# Altium PCB Flight_Computer_1.PcbDoc (part 3 of 4)
Units mm, origin at the board's own origin, x right, y up, seen from the top; angles counter-clockwise.
Board outline 101.6 x 76.2 mm, 4 copper layers (Top Layer, GND, 3.3V, Bottom Layer), stack 1.574 mm thick; 111 components, 86 nets, 493 pads, 1677 vias.
Unrouted connection lines stored in the file: 302.
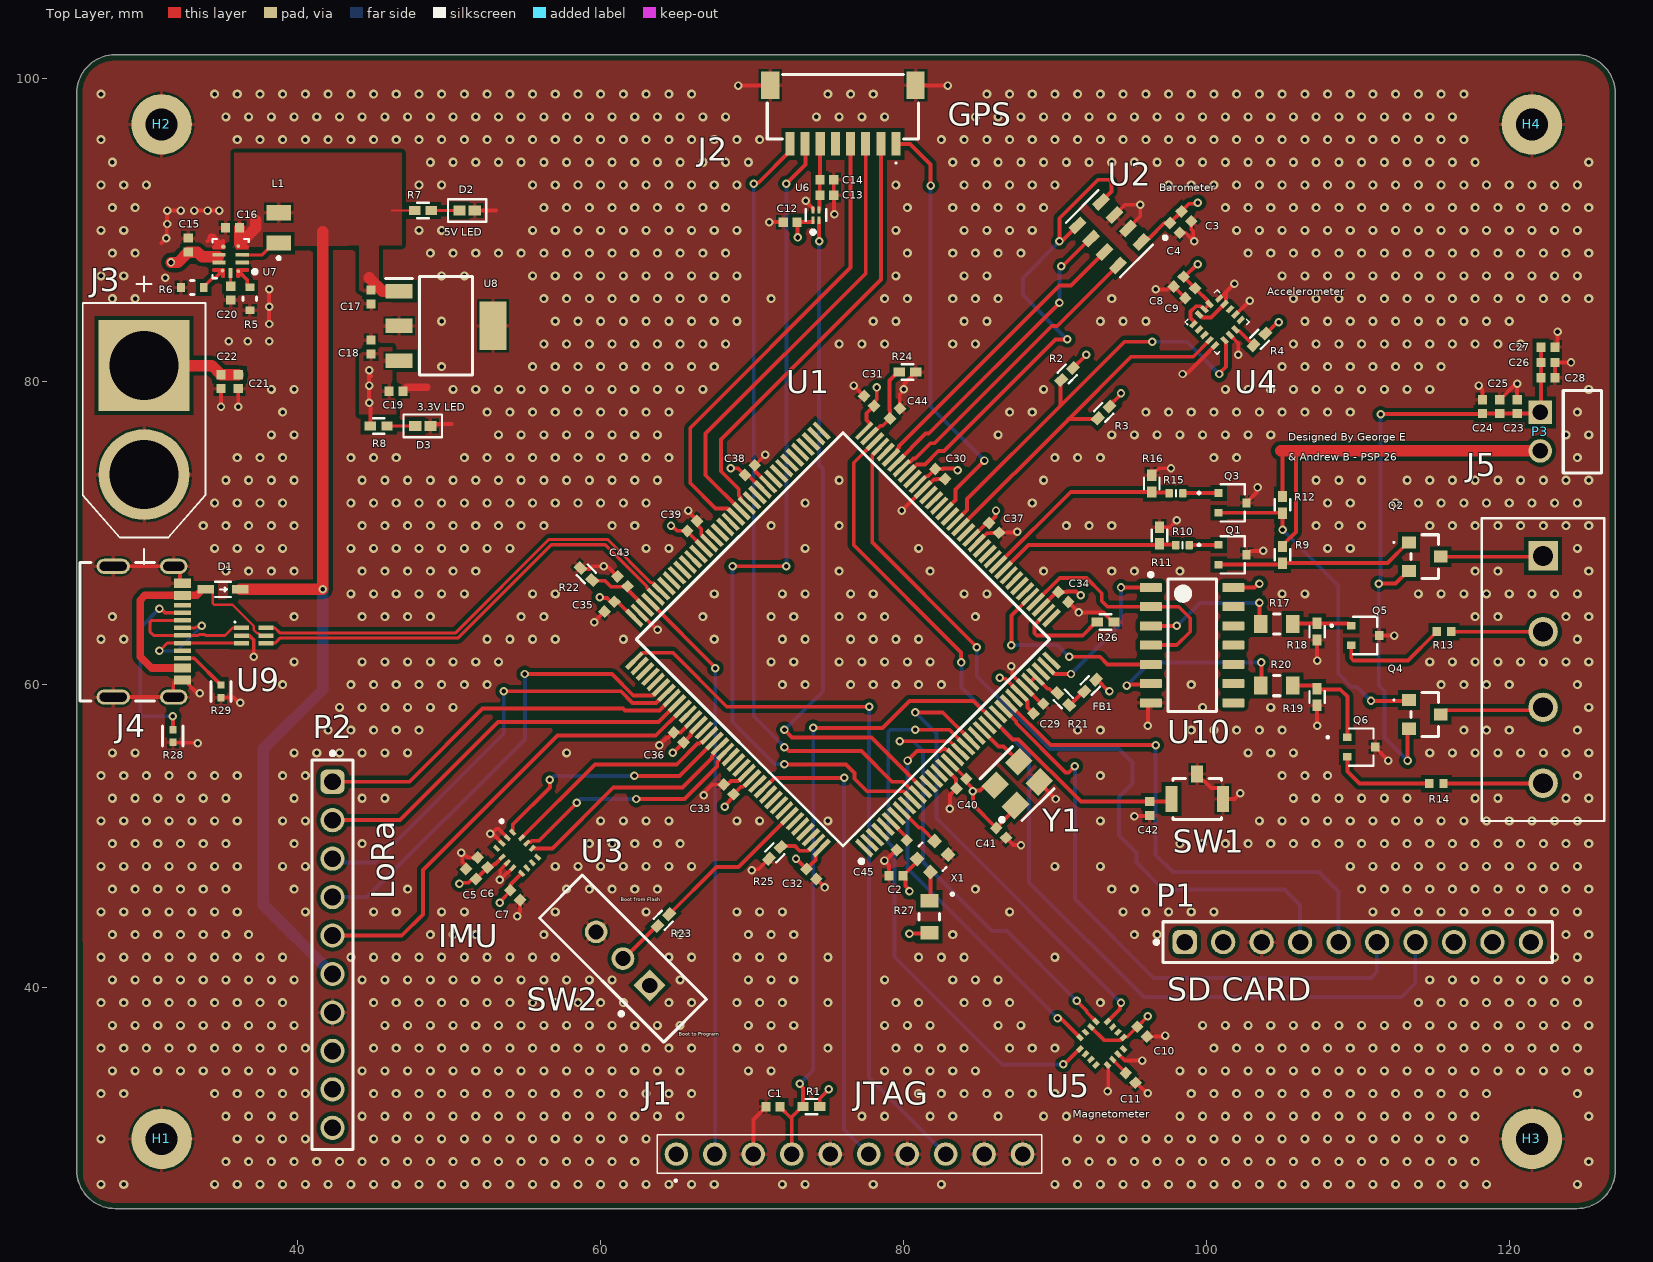
[diagram p0: Top Layer view]

## Part data (continued)
R8: library part R_1k_0402, "RES 1K OHM 1% 1/16W 0402", Case Code (Imperial)=0402, LCSC Part #=C106235, Manufacturer="Yageo Group", Manufacturer Part Number=RC0402FR-071KL, Max Operating Temperature=155°C, Min Operating Temperature=-55°C, Power Dissipation=62.5mW, Power Rating=63mW, Supplier Part Number=311-1.00KLRTR-ND, Temperature Coefficient=100ppm/°C, Tolerance=1%, Voltage Rating=50V, Case Code (Metric)=0402, Case/Package=0402, Category="Chip SMD Resistors", China RoHS=Non-Compliant, ComponentLink1Description=https://datasheet.octopart.com:443/RC0402FR-071KL-Yageo-datasheet-175887523.pdf?src-supplier=IHS, ComponentLink1URL=https://datasheet.octopart.com:443/RC0402FR-071KL-Yageo-datasheet-175887523.pdf?src-supplier=IHS, ComponentLink2Description=https://datasheet.octopart.com:443/RC0402FR-071KL-Yageo-datasheet-164759695.pdf?src-supplier=Upverter, ComponentLink2URL=https://datasheet.octopart.com:443/RC0402FR-071KL-Yageo-datasheet-164759695.pdf?src-supplier=Upverter, ComponentLink3Description=https://datasheet.octopart.com:443/RC0402FR-071KL-Yageo-datasheet-103092701.pdf?src-supplier=Upverter, ComponentLink3URL=https://datasheet.octopart.com:443/RC0402FR-071KL-Yageo-datasheet-103092701.pdf?src-supplier=Upverter, ComponentLink4Description=https://sigma.octopart.com:443/138820526/technical_drawing/Yageo-RC0402FR-071KL.pdf?src-supplier=Upverter, ComponentLink4URL=https://sigma.octopart.com:443/138820526/technical_drawing/Yageo-RC0402FR-071KL.pdf?src-supplier=Upverter, ComponentLink5Description=https://datasheet.octopart.com:443/RC0402FR-071KL-Yageo-datasheet-98239111.pdf?src-supplier=Upverter, ComponentLink5URL=https://datasheet.octopart.com:443/RC0402FR-071KL-Yageo-datasheet-98239111.pdf?src-supplier=Upverter, ComponentLink6Description=https://datasheet.octopart.com:443/RC0402FR-071KL-Yageo-datasheet-10408619.pdf?src-supplier=Newark, ComponentLink6URL=https://datasheet.octopart.com:443/RC0402FR-071KL-Yageo-datasheet-10408619.pdf?src-supplier=Newark, ComponentLink7Description=https://datasheet.octopart.com:443/RC0402FR-071KL-Yageo-datasheet-8324527.pdf?src-supplier=Newark, ComponentLink7URL=https://datasheet.octopart.com:443/RC0402FR-071KL-Yageo-datasheet-8324527.pdf?src-supplier=Newark, ComponentLink8Description=https://datasheet.octopart.com:443/RC0402FR-071KL-Yageo-datasheet-62067350.pdf?src-supplier=Farnell, ComponentLink8URL=https://datasheet.octopart.com:443/RC0402FR-071KL-Yageo-datasheet-62067350.pdf?src-supplier=Farnell, ComponentLink9Description=https://datasheet.octopart.com:443/RC0402FR-071KL-Yageo-datasheet-12531192.pdf?src-supplier=Future+Electronics, ComponentLink9URL=https://datasheet.octopart.com:443/RC0402FR-071KL-Yageo-datasheet-12531192.pdf?src-supplier=Future+Electronics, ComponentLink10Description=https://datasheet.octopart.com:443/RC0402FR-071KL-Yageo-datasheet-137700087.pdf?src-supplier=Future+Electronics, ComponentLink10URL=https://datasheet.octopart.com:443/RC0402FR-071KL-Yageo-datasheet-137700087.pdf?src-supplier=Future+Electronics, ComponentLink11Description=https://datasheet.octopart.com:443/RC0402FR-071KL-Yageo-datasheet-8324255.pdf?src-supplier=Future+Electronics, ComponentLink11URL=https://datasheet.octopart.com:443/RC0402FR-071KL-Yageo-datasheet-8324255.pdf?src-supplier=Future+Electronics, ComponentLink12Description=https://datasheet.octopart.com:443/RC0402FR-071KL-Yageo-datasheet-8329306.pdf?src-supplier=element14, ComponentLink12URL=https://datasheet.octopart.com:443/RC0402FR-071KL-Yageo-datasheet-8329306.pdf?src-supplier=element14, ComponentLink13Description=https://datasheet.octopart.com:443/RC0402FR-071KL-Yageo-datasheet-505231.pdf?src-supplier=element14, ComponentLink13URL=https://datasheet.octopart.com:443/RC0402FR-071KL-Yageo-datasheet-505231.pdf?src-supplier=element14, ComponentLink14Description=https://datasheet.octopart.com:443/RC0402FR-071KL-Yageo-datasheet-175423674.pdf?src-supplier=SOS+electronic, ComponentLink14URL=https://datasheet.octopart.com:443/RC0402FR-071KL-Yageo-datasheet-175423674.pdf?src-supplier=SOS+electronic, ComponentLink15Description=https://datasheet.octopart.com:443/RC0402FR-071KL-Yageo-datasheet-148775077.pdf?src-supplier=TME, ComponentLink15URL=https://datasheet.octopart.com:443/RC0402FR-071KL-Yageo-datasheet-148775077.pdf?src-supplier=TME, ComponentLink16Description=https://datasheet.octopart.com:443/RC0402FR-071KL-Yageo-datasheet-79472498.pdf?src-supplier=Megastar, ComponentLink16URL=https://datasheet.octopart.com:443/RC0402FR-071KL-Yageo-datasheet-79472498.pdf?src-supplier=Megastar, ComponentLink17Description=https://datasheet.octopart.com/RC0402FR-071KL-Yageo-datasheet-73766026.pdf, ComponentLink17URL=https://datasheet.octopart.com/RC0402FR-071KL-Yageo-datasheet-73766026.pdf, ComponentLink18Description=http://sigma.octopart.com:80/rohs_statement/Yageo-company-2.pdf?src-supplier=Compliance+Statements, ComponentLink18URL=http://sigma.octopart.com:80/rohs_statement/Yageo-company-2.pdf?src-supplier=Compliance+Statements, ComponentLink19Description=http://sigma.octopart.com:80/conflict_mineral_statement/Yageo-company-3.pdf?src-supplier=Compliance+Statements, ComponentLink19URL=http://sigma.octopart.com:80/conflict_mineral_statement/Yageo-company-3.pdf?src-supplier=Compliance+Statements, Composition="Thick Film", Depth=500µm, Height=350µm, Lead Free="Lead Free", Length=1mm, Lifecycle Status=Production, Military Standard=Not, Mounting Technology="Surface Mount", Number of Terminals=2, Packaging="Tape & Reel", Pins=2, Pricing="10000=0.00204, 20000=0.002, 30000=0.00196, 50000=0.00182, 70000=0.00181 (USD)", REACH SVHC=Yes, RoHS=Compliant, Schedule B="8533210045, 8533210045|8533210045|8533210045|8533210045|8533210045|8533210045|8533210045|8533210045|8533210045|8533210045|8533210045|8533210045|8533210045|8533210045|8533210045|8533210045|8533210045|8533210045|8533210045|8533210045|8533210045|8533210045|8533210045|85", Stock=4926888, Supplier=DigiKey, Termination=SMD/SMT, Voltage Rating (AC)=50V, Voltage Rating (DC)=50V, Width=500µm, Working Voltage=50V
R10 R15: library part CMP-009-00164-4, "Chip Resistor, 22 Ohms, +/-5 %, 63 mW, -55 to 155 degC, 0402", Case/Package=0402, Max Operating Temperature=155°C, Min Operating Temperature=-55°C, Power=63mW, Tolerance=5%, Pins=2
R13 R14 R21 R22 R24 R25 R26: library part R_0R_0402, "GENERAL PURPOSE CHIP RESISTOR Metal Glaze/thick Film, 0.0625W, 0ohm, Surface Mount, 0402", Case Code (Imperial)=0402, LCSC Part #=C60485, Manufacturer="Yageo Group", Manufacturer Part Number=RC0402JR-070RL, Max Operating Temperature=155°C, Max Power Dissipation=63mW, Min Operating Temperature=-55°C, Power Dissipation=62.5mW, Supplier Part Number=311-0.0JRDKR-ND, Temperature Coefficient=200ppm/°C, Tolerance=5%, Voltage Rating=50V, Case/Package=0402, Category="Chip SMD Resistors", China RoHS=Non-Compliant, ComponentLink1Description=https://datasheet.octopart.com:443/RC0402JR-070RL-Yageo-datasheet-182189538.pdf?src-supplier=IHS, ComponentLink1URL=https://datasheet.octopart.com:443/RC0402JR-070RL-Yageo-datasheet-182189538.pdf?src-supplier=IHS, ComponentLink2Description=https://datasheet.octopart.com:443/RC0402JR-070RL-Yageo-datasheet-10408619.pdf?src-supplier=Newark, ComponentLink2URL=https://datasheet.octopart.com:443/RC0402JR-070RL-Yageo-datasheet-10408619.pdf?src-supplier=Newark, ComponentLink3Description=https://datasheet.octopart.com:443/RC0402JR-070RL-Yageo-datasheet-12531192.pdf?src-supplier=Seeed+Studio, ComponentLink3URL=https://datasheet.octopart.com:443/RC0402JR-070RL-Yageo-datasheet-12531192.pdf?src-supplier=Seeed+Studio, ComponentLink4Description=https://datasheet.octopart.com:443/RC0402JR-070RL-Yageo-datasheet-8324527.pdf?src-supplier=TME, ComponentLink4URL=https://datasheet.octopart.com:443/RC0402JR-070RL-Yageo-datasheet-8324527.pdf?src-supplier=TME, ComponentLink5Description=https://datasheet.octopart.com:443/RC0402JR-070RL-Yageo-datasheet-62067350.pdf?src-supplier=Farnell, ComponentLink5URL=https://datasheet.octopart.com:443/RC0402JR-070RL-Yageo-datasheet-62067350.pdf?src-supplier=Farnell, ComponentLink6Description=https://datasheet.octopart.com:443/RC0402JR-070RL-Yageo-datasheet-8329306.pdf?src-supplier=element14, ComponentLink6URL=https://datasheet.octopart.com:443/RC0402JR-070RL-Yageo-datasheet-8329306.pdf?src-supplier=element14, ComponentLink7Description=https://datasheet.octopart.com:443/RC0402JR-070RL-Yageo-datasheet-505231.pdf?src-supplier=element14, ComponentLink7URL=https://datasheet.octopart.com:443/RC0402JR-070RL-Yageo-datasheet-505231.pdf?src-supplier=element14, ComponentLink8Description=https://datasheet.octopart.com:443/RC0402JR-070RL-Yageo-datasheet-175423674.pdf?src-supplier=SOS+electronic, ComponentLink8URL=https://datasheet.octopart.com:443/RC0402JR-070RL-Yageo-datasheet-175423674.pdf?src-supplier=SOS+electronic, ComponentLink9Description=https://datasheet.octopart.com:443/RC0402JR-070RL-Yageo-datasheet-164759695.pdf?src-supplier=Future+Electronics, ComponentLink9URL=https://datasheet.octopart.com:443/RC0402JR-070RL-Yageo-datasheet-164759695.pdf?src-supplier=Future+Electronics, ComponentLink10Description=https://datasheet.octopart.com:443/RC0402JR-070RL-Yageo-datasheet-137700087.pdf?src-supplier=Future+Electronics, ComponentLink10URL=https://datasheet.octopart.com:443/RC0402JR-070RL-Yageo-datasheet-137700087.pdf?src-supplier=Future+Electronics, ComponentLink11Description=https://datasheet.octopart.com/RC0402JR-070RL-Yageo-datasheet-73766026.pdf, ComponentLink11URL=https://datasheet.octopart.com/RC0402JR-070RL-Yageo-datasheet-73766026.pdf, ComponentLink12Description=http://sigma.octopart.com:80/rohs_statement/Yageo-company-2.pdf?src-supplier=Compliance+Statements, ComponentLink12URL=http://sigma.octopart.com:80/rohs_statement/Yageo-company-2.pdf?src-supplier=Compliance+Statements, ComponentLink13Description=http://sigma.octopart.com:80/conflict_mineral_statement/Yageo-company-3.pdf?src-supplier=Compliance+Statements, ComponentLink13URL=http://sigma.octopart.com:80/conflict_mineral_statement/Yageo-company-3.pdf?src-supplier=Compliance+Statements, Composition="Thick Film", Contact Plating=Tin, Depth=500µm, Features="Moisture Resistant", Height=350µm, Lead Free="Lead Free", Length=1mm, Lifecycle Status=Production, Military Standard=Not, Mounting Technology="Surface Mount", Number of Terminals=2, Number of Terminations=2, Packaging="Tape & Reel", Pins=2, Power Rating=63mW, Pricing="1=0.1, 10=0.010, 25=0.0064, 50=0.0054, 100=0.0047, 250=0.00392, 500=0.00346, 1000=0.00304, 5000=0.0023 (USD)", Radiation Hardening=No, REACH SVHC=Yes, RoHS=Compliant, Schedule B="8533290000, 8533290000|8533290000, 8533290000|8533290000|8533290000, 8533290000|8533290000|8533290000|8533290000", Stock=23041339, Supplier=DigiKey, Termination=SMD/SMT, Voltage Rating (DC)=50V, Width=500µm
R17 R20 R27: library part CMP-03412-037823-1, "RES SMD 0 OHM JUMPER 1/8W 0805", Case Code (Imperial)=0805, Case Code (Metric)=2012, Max Operating Temperature=155°C, Max Power Dissipation=125mW, Min Operating Temperature=-55°C, Resistance=0R, Resistor Type="Thick Film", Temperature Coefficient=200ppm/°C, Tolerance=5%, Voltage Rating=150V, Case/Package=0805, Features="Moisture Resistant", Height=0.024inch, Lead Free="Lead Free", Length=0.079inch, Number of Terminations=2, Packaging="Tape and Reel", Power Rating=125mW, Series=AC, Termination=SMD/SMT, Width=1.25mm
R28 R29: library part CMP-04015-008529-1, "5.1kΩ ±1% 0.063W, 1/16W Chip Resistor 0402 (1005 Metric) Moisture Resistant Thin Film"
SW1: library part CMP-08834-000028-1, "SWITCH TACTILE SPST-NO 0.05A 12V", Case/Package=SMD/SMT, Contact Resistance=100mR, Current Rating=50mA, Max Operating Temperature=70°C, Max Voltage Rating (DC)=12V, Min Operating Temperature=-25°C, Operating Force=1.5N, Package Quantity=1000, Ratings="Dust Proof", Actuator Length=0.4mm, Actuator Type=Standard, Connector Type=SMD/SMT, Electrical Life=200000Cycles, Illumination Type=Non-Illuminated, Mechanical Life=200000Cycles, Mount="Surface Mount", Orientation=Straight, Packaging="Tape and Reel", REACH SVHC="No SVHC", RoHS Compliant=Yes, Series=B3U, Switch Function=Off-Mom, Switch Travel=0.15mm, Termination=SMD/SMT, Throw Configuration=SPST, Voltage Rating (DC)=12V, Weight=0.022g
SW2: library part CMP-011-00006-2, "Slide Switch, SPDT, 500 V, -20 to 70 degC, 3-Pin THD, RoHS, Bulk", Contact Current Rating=200mA, Manufacturer=E-Switch, Max Operating Temperature=70°C, Min Operating Temperature=-20°C, Operating Force=250gf, Package Description="3-Pin Through Hole Device, Body 11.6 x 4 mm, Pitch 2.5 mm", Package Quantity=1000, Voltage Rating (AC)=30V, Case/Package=EG1218, Contact Finish=Silver, Contact Material=Copper, Contact Plating=Silver, Current Rating=200mA, Datasheet URL=https://www.e-switch.com/system/asset/product_line/data_sheet/119/EG.pdf, Datasheet Version=Oct-15, Manufacturer URL=http://www.e-switch.ch/en/, Mounting Technology=TH, Package Reference=EG1218, Packaging=Bulk, Pins=3, RoHS Compliant=True, Throw Configuration=SPDT, Voltage Rating (DC)=30V
U1: "Integrated Circuit", Manufacturer_Name=STMicroelectronics, Mouser Part Number=511-STM32F765ZIT7, Arrow Part Number=STM32F765ZIT7, Arrow Price/Stock=https://www.arrow.com/en/products/stm32f765zit7/stmicroelectronics?utm_currency=USD&region=nac, Datasheet Link=https://www.st.com/resource/en/datasheet/stm32f765bi.pdf, Height=1.6mm, Manufacturer_Part_Number=STM32F765ZIT7, Mouser Price/Stock=https://www.mouser.co.uk/ProductDetail/STMicroelectronics/STM32F765ZIT7?qs=lYGu3FyN48df6bb2YhdYOw%3D%3D
U2: "SENSOR 17.4PSIA 24BIT 8SMD", LCSC Part #=C97627, Manufacturer="TE Connectivity", Max Operating Temperature=85°C, Max Supply Voltage=3.6V, Min Operating Temperature=-40°C, Min Supply Voltage=1.8V, Operating Current-Max=1.4mA, Package Shape/Style=Rectangular, Supplier Part Number=223-1198-1-ND, Accuracy-Max (%)=4%, Body Breadth=3mm, Body Height=0.95mm, Body Length or Diameter=5mm, Category="Pressure Sensors", ComponentLink1Description=https://www.te.com:443/usa-en/product-MS560702BA03-50.datasheet.pdf?src-supplier=IHS+Markit, ComponentLink1URL=https://www.te.com:443/usa-en/product-MS560702BA03-50.datasheet.pdf?src-supplier=IHS+Markit, ComponentLink2Description=http://www.farnell.com/datasheets/1756127.pdf?src-supplier=Farnell, ComponentLink2URL=http://www.farnell.com/datasheets/1756127.pdf?src-supplier=Farnell, ComponentLink3Description=https://datasheet.octopart.com/MS560702BA03-50-TE-Connectivity-datasheet-21074431.pdf?src-supplier=Element14, ComponentLink3URL=https://datasheet.octopart.com/MS560702BA03-50-TE-Connectivity-datasheet-21074431.pdf?src-supplier=Element14, ComponentLink4Description=https://www.te.com/commerce/DocumentDelivery/DDEController?Action=srchrtrv&DocNm=MS5607-02BA03&DocType=Data+Sheet&DocLang=English&src-supplier=Digikey, ComponentLink4URL=https://www.te.com/commerce/DocumentDelivery/DDEController?Action=srchrtrv&DocNm=MS5607-02BA03&DocType=Data+Sheet&DocLang=English&src-supplier=Digikey, ComponentLink5Description=https://datasheet.octopart.com/MS560702BA03-50-TE-Connectivity-datasheet-176112741.pdf?src-supplier=Future+Electronics, ComponentLink5URL=https://datasheet.octopart.com/MS560702BA03-50-TE-Connectivity-datasheet-176112741.pdf?src-supplier=Future+Electronics, ComponentLink6Description=https://datasheet.octopart.com/MS560702BA03-50-TE-Connectivity-datasheet-65793091.pdf?src-supplier=Sager+Electronics, ComponentLink6URL=https://datasheet.octopart.com/MS560702BA03-50-TE-Connectivity-datasheet-65793091.pdf?src-supplier=Sager+Electronics, Manufacturer Part Number=MS560702BA03-50, Mounting Technology="Surface Mount", Number of Bits=24, Output Interface Type=I2C, Output Range=0-3V, Output Type="DIGITAL VOLTAGE", Pressure Range-Max=15.95PSI, Pressure Range-Min=4.351PSI, Pressure Type=Barometric, Pricing="1=9.05, 5=8.384, 10=7.721, 25=7.436, 50=6.9272, 100=5.8731, 500=5.46908, 1000=5.89422, 3600=5.375 (USD)", Reach SVHC Compliant=No, Response Time=8220us, RoHS=Yes, RoHS Compliant=Yes, Sensor Type="PRESSURE SENSOR,PEIZORESISTIVE", Stock=43971, Supplier=Digikey, Termination=Solder
U3: "Accelerometer and Gyroscope 6-Axis 3D Digital-I2C/Digital-SPI-OUT 14-Pin LGA T/R", LCSC Part #=C459826, Manufacturer=STMicroelectronics, Max Operating Temperature=105°C, Max Supply Voltage=3.6V, Min Operating Temperature=-40°C, Min Supply Voltage=2V, Mouser Part Number=511-ASM330LHHTR, Operating Supply Voltage=3V, Supplier Part Number=497-19078-1-ND, Arrow Part Number=ASM330LHHTR, Arrow Price/Stock=https://www.arrow.com/en/products/asm330lhhtr/stmicroelectronics?utm_currency=USD&region=europe, Category=Accelerometers, China RoHS=Non-Compliant, ComponentLink1Description=https://datasheet.octopart.com:443/ASM330LHHTR-STMicroelectronics-datasheet-181242432.pdf?src-supplier=IHS, ComponentLink1URL=https://datasheet.octopart.com:443/ASM330LHHTR-STMicroelectronics-datasheet-181242432.pdf?src-supplier=IHS, ComponentLink2Description=https://datasheet.octopart.com:443/ASM330LHHTR-STMicroelectronics-datasheet-129375621.pdf?src-supplier=ODG+(Origin+Data+Global), ComponentLink2URL=https://datasheet.octopart.com:443/ASM330LHHTR-STMicroelectronics-datasheet-129375621.pdf?src-supplier=ODG+(Origin+Data+Global), Datasheet Link=https://www.st.com/resource/en/datasheet/asm330lhh.pdf, Height=0.86mm, Height - Seated (Max)=860µm, Length=3mm, Lifecycle Status=Production, Manufacturer Part Number=ASM330LHHTR, Manufacturer_Name=STMicroelectronics, Manufacturer_Part_Number=ASM330LHHTR, Mouser Price/Stock=https://www.mouser.co.uk/ProductDetail/STMicroelectronics/ASM330LHHTR?qs=lc2O%252BfHJPVYgP8P9MzExKQ%3D%3D, Number of Circuits=1, Number of Terminals=14, Output Type=Digital, Pricing="1=7.25, 5=6.54, 10=6.275, 25=5.9592, 50=5.743, 100=5.545, 500=5.34888 (USD)", REACH SVHC=Yes, RoHS=Compliant, Stock=5000, Supplier=DigiKey, Terminal Pitch=500µm, Width=2.5mm
U4: "ACCELEROMETER 100G I2C/SPI 16LGA", Case/Package=LGA, LCSC Part #=C2655068, Manufacturer=STMicroelectronics, Max Operating Temperature=85°C, Max Supply Voltage=3.6V, Min Operating Temperature=-40°C, Min Supply Voltage=2.16V, Mouser Part Number=511-H3LIS100DLTR, Operating Supply Voltage=2.5V, Supplier Part Number=497-15697-1-ND, Arrow Part Number=H3LIS100DLTR, Arrow Price/Stock=https://www.arrow.com/en/products/h3lis100dltr/stmicroelectronics?region=nac, Axis="X, Y, Z", Bandwidth=200Hz, Category=Accelerometers, China RoHS=Non-Compliant, ComponentLink1Description=https://datasheet.octopart.com:443/H3LIS100DLTR-STMicroelectronics-datasheet-181243375.pdf?src-supplier=IHS, ComponentLink1URL=https://datasheet.octopart.com:443/H3LIS100DLTR-STMicroelectronics-datasheet-181243375.pdf?src-supplier=IHS, ComponentLink2Description=https://datasheet.octopart.com:443/H3LIS100DLTR-STMicroelectronics-datasheet-41189296.pdf?src-supplier=element14+APAC, ComponentLink2URL=https://datasheet.octopart.com:443/H3LIS100DLTR-STMicroelectronics-datasheet-41189296.pdf?src-supplier=element14+APAC, Datasheet Link=https://www.st.com/resource/en/datasheet/h3lis100dl.pdf, Height=1mm, Height - Seated (Max)=1mm, Lead Free="Lead Free", Length=3mm, Lifecycle Status=Production, Manufacturer Part Number=H3LIS100DLTR, Manufacturer_Name=STMicroelectronics, Manufacturer_Part_Number=H3LIS100DLTR, Mounting Technology="Surface Mount", Mouser Price/Stock=https://www.mouser.co.uk/ProductDetail/STMicroelectronics/H3LIS100DLTR?qs=v3MacVxtdDLHj8sdza6BGw%3D%3D, Number of Circuits=1, Number of Terminals=16, Output Type=Digital, Pins=16, Pricing="1=6.69, 5=6.03, 10=5.783, 25=5.4888, 50=5.2876, 100=5.1032, 500=4.88678 (USD)", REACH SVHC=No, RoHS=Compliant, Schedule B="8542390000, 8542390000|8542390000|8542390000|8542390000|8542390000|8542390000|8542390000|8542390000|8542390000|8542390000|8542390000|8542390000|8542390000|8542390000|8542390000|8542390000|8542390000|8542390000|8542390000|8542390000|8542390000|8542390000|8542390000|85", Stock=8694, Supplier=DigiKey, Terminal Pitch=500µm, Width=3mm
U5: "8 Gauss, High Performance 3-axis Magnetic Sensor Automotive AEC-Q100", LCSC Part #=C404329, Manufacturer=Memsic, Manufacturer_Name=MEMSIC, Max Operating Temperature=105°C, Max Supply Voltage=3.6V, Min Operating Temperature=-40°C, Min Supply Voltage=2.8V, Mouser Part Number=438-MMC5983MA, Supplier Part Number=1267-MMC5983MACT-ND, Arrow Part Number=MMC5983MA, Arrow Price/Stock=https://www.arrow.com/en/products/mmc5983ma/memsic?utm_currency=USD&region=nac, Category="Linear ICs", ComponentLink1Description=https://datasheet.octopart.com:443/MMC5983MA-Memsic-datasheet-180628270.pdf?src-supplier=IHS, ComponentLink1URL=https://datasheet.octopart.com:443/MMC5983MA-Memsic-datasheet-180628270.pdf?src-supplier=IHS, ComponentLink2Description=https://datasheet.octopart.com:443/MMC5983MA-Memsic-datasheet-160655074.pdf?src-supplier=Upverter, ComponentLink2URL=https://datasheet.octopart.com:443/MMC5983MA-Memsic-datasheet-160655074.pdf?src-supplier=Upverter, Datasheet Link=https://www.mouser.com/datasheet/2/821/Memsic_09102019_MMC5983MA_Datasheet_Rev_A-1635338.pdf, Height=1mm, Length=3mm, Manufacturer Part Number=MMC5983MA, Manufacturer_Part_Number=MMC5983MA, Mounting Technology="Surface Mount", Mouser Price/Stock=https://www.mouser.co.uk/ProductDetail/MEMSIC/MMC5983MA?qs=B6kkDfuK7%2FD5qasHMdEt2g%3D%3D, Number of Terminals=16, Pricing="1=2.79, 5=2.49, 10=2.378, 25=2.244, 50=2.1522, 100=2.0681, 500=1.899, 1000=1.83604 (USD)", REACH SVHC=Yes, RoHS=Compliant, Sensing Method=Magnetoresistive, Stock=65243, Supplier=DigiKey
U6: library part CMP-009-00205-1, "5V, 3A, 25M LOAD SWITCH WITH OPT", Pins=4
U7: "IC REG BUCK ADJ 3A 9VQFN", LCSC Part #=C5342042, Manufacturer="Texas Instruments", Supplier Part Number=296-TPS62993QRYTRQ1CT-ND, Category="Integrated Circuits (ICs)", Manufacturer Part Number=TPS62993QRYTRQ1, Pricing="1=1.93, 10=1.418, 25=1.2916, 100=1.1519, 250=1.0854, 500=1.0453, 1000=1.01229 (USD)", RoHS=No, Stock=5849, Supplier=Digikey
U8: "1.5-A, 20-V, low-dropout voltage regulator with reverse current & reverse voltage protection", Case/Package=SOT-223, Dropout Voltage=340mV, Input Bias Current=1mA, LCSC Part #=C181262, Manufacturer="Texas Instruments", Manufacturer Lifecycle Status=ACTIVE, Max Operating Temperature=125°C, Max Output current=1.5A, Max Output Voltage=3.3V, Max Supply Voltage=20V, Min Current Limit=1.6A, Min Input Voltage=2.1V, Min Operating Temperature=-40°C, Mouser Part Number=595-TL1963A-33DCYR, Supplier Part Number=296-24897-1-ND, Accuracy=3%, Arrow Part Number=TL1963A-33DCYR, Arrow Price/Stock=https://www.arrow.com/en/products/tl1963a-33dcyr/texas-instruments?utm_currency=USD&region=nac, Category="LDO Voltage Regulators", ComponentLink1Description=https://datasheet.octopart.com:443/TL1963A-33DCYR-Texas-Instruments-datasheet-36835243.pdf?src-supplier=Texas+Instruments, ComponentLink1URL=https://datasheet.octopart.com:443/TL1963A-33DCYR-Texas-Instruments-datasheet-36835243.pdf?src-supplier=Texas+Instruments, ComponentLink2Description=https://octopart.com:443/opatz8j6/c1?t=3Lun9PgwTMhtjoCtZHlriymffnwWqKd51HlxjKqmfGY6_H2C_KBuCJotYNbhgrmUW1am7v6JdR1BM8r4TVwEJHz6z_rYMi0Qs0z031CNxm_B_9-BYGGxZ_Fe_No2pK5gm8TBALu2o229stvTAGB7nDQj_d6eLc_WleCR5PgeZcoHvq5uYRxI2mhH3aTbYxZvOcpV44gzguOSokgnxqAqTlA2HdDmfd41lcX8KmPOnU485MJM9pETPtWF01ZaQY57NDW7-ROrD2Y9bItpv_3any2aMifmmrhF_toBthhzSyuf2zhFnIbHnl95_iEcXCGpEhG0L2gK6G5uW0d_9rjbvPyTU-a0lHmUSU5HzPKTGuVJR0-dcjYtdbWCQCILPtH1cCuZdAY&src-supplier=Texas+Instruments, ComponentLink2URL=https://octopart.com:443/opatz8j6/c1?t=3Lun9PgwTMhtjoCtZHlriymffnwWqKd51HlxjKqmfGY6_H2C_KBuCJotYNbhgrmUW1am7v6JdR1BM8r4TVwEJHz6z_rYMi0Qs0z031CNxm_B_9-BYGGxZ_Fe_No2pK5gm8TBALu2o229stvTAGB7nDQj_d6eLc_WleCR5PgeZcoHvq5uYRxI2mhH3aTbYxZvOcpV44gzguOSokgnxqAqTlA2HdDmfd41lcX8KmPOnU485MJM9pETPtWF01ZaQY57NDW7-ROrD2Y9bItpv_3any2aMifmmrhF_toBthhzSyuf2zhFnIbHnl95_iEcXCGpEhG0L2gK6G5uW0d_9rjbvPyTU-a0lHmUSU5HzPKTGuVJR0-dcjYtdbWCQCILPtH1cCuZdAY&src-supplier=Texas+Instruments, ComponentLink3Description=https://datasheet.octopart.com:443/TL1963A-33DCYR-Texas-Instruments-datasheet-10255270.pdf?src-supplier=Texas+Instruments, ComponentLink3URL=https://datasheet.octopart.com:443/TL1963A-33DCYR-Texas-Instruments-datasheet-10255270.pdf?src-supplier=Texas+Instruments, ComponentLink4Description=https://sigma.octopart.com:443/49253063/technical_drawing/Texas-Instruments-TL1963A-33DCYR.pdf?src-supplier=Texas+Instruments, ComponentLink4URL=https://sigma.octopart.com:443/49253063/technical_drawing/Texas-Instruments-TL1963A-33DCYR.pdf?src-supplier=Texas+Instruments, ComponentLink5Description=https://datasheet.octopart.com:443/TL1963A-33DCYR-Texas-Instruments-datasheet-159117591.pdf?src-supplier=Augswan, ComponentLink5URL=https://datasheet.octopart.com:443/TL1963A-33DCYR-Texas-Instruments-datasheet-159117591.pdf?src-supplier=Augswan, ComponentLink6Description=https://datasheet.octopart.com:443/TL1963A-33DCYR-Texas-Instruments-datasheet-21820479.pdf?src-supplier=Newark, ComponentLink6URL=https://datasheet.octopart.com:443/TL1963A-33DCYR-Texas-Instruments-datasheet-21820479.pdf?src-supplier=Newark, ComponentLink7Description=https://datasheet.octopart.com:443/TL1963A-33DCYR-Texas-Instruments-datasheet-16079880.pdf?src-supplier=Farnell, ComponentLink7URL=https://datasheet.octopart.com:443/TL1963A-33DCYR-Texas-Instruments-datasheet-16079880.pdf?src-supplier=Farnell, ComponentLink8Description=https://datasheet.octopart.com:443/TL1963A-33DCYR-Texas-Instruments-datasheet-14171511.pdf?src-supplier=iiiC, ComponentLink8URL=https://datasheet.octopart.com:443/TL1963A-33DCYR-Texas-Instruments-datasheet-14171511.pdf?src-supplier=iiiC, ComponentLink9Description=http://sigma.octopart.com:80/conflict_mineral_statement/Texas-Instruments-company-63.pdf?src-supplier=Compliance+Statements, ComponentLink9URL=http://sigma.octopart.com:80/conflict_mineral_statement/Texas-Instruments-company-63.pdf?src-supplier=Compliance+Statements, ComponentLink10Description=http://sigma.octopart.com:80/reach_statement/Texas-Instruments-company-64.pdf?src-supplier=Compliance+Statements, ComponentLink10URL=http://sigma.octopart.com:80/reach_statement/Texas-Instruments-company-64.pdf?src-supplier=Compliance+Statements, Contact Plating=Tin, Datasheet Link=http://www.ti.com/lit/gpn/tl1963a, Height=1.8mm, Lead Free="Lead Free", Length=6.5mm, Lifecycle Status=Production, Manufacturer Part Number=TL1963A-33DCYR, Manufacturer_Name="Texas Instruments", Manufacturer_Part_Number=TL1963A-33DCYR, Min Output Voltage=3.3V, Mouser Price/Stock=https://www.mouser.co.uk/ProductDetail/Texas-Instruments/TL1963A-33DCYR?qs=IK5e5L0zOXhRu%2FNTAfJNEA%3D%3D, Nominal Output Voltage=3.3V, Number of Outputs=1, Number of Regulators=1, Output Current=1.5A, Output Type=Fixed, Output Voltage=3.3V, Pins=4, Polarity=Positive, Pricing="1=3.13, 10=2.344, 25=2.1476, 100=1.9323, 250=1.82956, 500=1.76766, 1000=1.71669 (USD)", Quiescent Current=1mA, Radiation Hardening=No, REACH SVHC=No, RoHS=Compliant, Schedule B="8542390000, 8542390000|8542390000|8542390000|8542390000|8542390000", Stock=4355, Supplier=DigiKey, Thickness=1.6mm, Width=3.5mm
U9: "Integrated Circuit", LCSC Part #=C15999, Manufacturer_Name=STMicroelectronics, Mouser Part Number=511-USBLC6-2P6, Arrow Part Number=USBLC6-2P6, Arrow Price/Stock=https://www.arrow.com/en/products/usblc6-2p6/stmicroelectronics?utm_currency=USD&region=europe, Datasheet Link=https://datasheet.lcsc.com/szlcsc/STMicroelectronics-USBLC6-2P6_C15999.pdf, Height=0.6mm, Manufacturer_Part_Number=USBLC6-2P6, Mouser Price/Stock=https://www.mouser.co.uk/ProductDetail/STMicroelectronics/USBLC6-2P6?qs=6ARB0lp6jlViGcbUSvj1Mw%3D%3D
U10: library part CMP-0777-00108-3, "Quadruple 2-Input Positive-AND Gate, D0014A, LARGE T&R", F @ Nom Voltage(Max)(Mhz)=70, Generic Part Number=SN74LVC08A, ICC @ Nom Voltage(Max)(mA)=0.01, Manufacturer="Texas Instruments", Operating Temperature Range(C)="-40 to 125", Rating=Catalog, tpd @ Nom Voltage(Max)(ns)=9.8,6.9,4.8,4.1, Voltage(Nom)(V)=1.8,2.5,2.7,3.3, Bits(#)=4, DatasheetVersion=SCAS283Q, Input Type=TTL, Output Drive (IOL/IOH)(Max)(mA)=-24/24, Output Type=TTL, PackageReference=D0014A, Schmitt Trigger=No, Technology Family=LVC, VCC(Max)(V)=3.6, VCC(Min)(V)=1.65
X1: library part CMP-062-000000-2, "Description", Manufacturer_Name=Microchip, Copyright="Copyright (C) 2025 Ultra Librarian. All rights reserved.", Design Item ID=DSA6101JL2B-032K768VAO, Manufacturer_Part_Number=DSA6101JL2B-032K768VAO, RefDes=RefDes, Source=DSA6101JL2B-032K768VAO.SchLib, Type=Oscillators
Y1: library part CMP-25159-260170-1, "MEMS OSC XO 8.0000MHZ H/LV-CMOS", Case/Package=SMD/SMT, Frequency=8MHz, Frequency Stability=25ppm, Max Operating Temperature=85°C, Max Supply Current=4.5mA, Min Operating Temperature=-40°C, Mount="Surface Mount", Packaging="Cut Tape", RoHS Compliant=Yes, Series=SIT8008B

## Via types
v1: diameter 0.6, hole 0.3, Top Layer to Bottom Layer, 1516 vias
v2: diameter 0.559, hole 0.305, Top Layer to Bottom Layer, 161 vias

## Nets (pads, with @x,y where several pads share a name; then routed paths per layer and width w, separated by ;. In a path a pad name is that pad's centre, name@x,y a point inside that pad or via, vN(x,y) a via of type N, cw(c..) or ccw(c..) an arc to the next point about the centre after c; other vN are vias at no path point)
3V3: C2.1 C3.2 C4.2 C5.2 C6.2 C7.2 C8.2 C9.2 C10.2 C12.2 C18.2 C19.2 C29.1 C30.1 C31.1 C32.1 C33.1 C34.1 C35.1 C36.1 C37.1 C38.1 C39.1 C40.1 C41.1 FB1.1 J1.1 P1.1 R1.2 R2.2 R3.2 R4.2 R8.2 R27.1 SW2.1 U1.17 U1.30 U1.39 U1.52 U1.62 U1.72 U1.84 U1.95 U1.108 U1.121 U1.131 U1.144 U2.1 U3.5 U3.8 U4.1 U4.14 U4.15 U5.2 U5.13 U6.1 U8.3 U10.14 X1.4 Y1.1 Y1.4 | length 81.4
  Top Layer w0.254: v2(44.704,78.613) v2(44.704,79.756) v2(44.704,80.772) 44.762,80.714 44.762,80.46 44.831,80.391 ; R8.2@44.789,77.089 44.789,78.19 44.831,78.232 ; v2(50.673,46.863) 50.731,46.921 51.264,46.921 51.516,47.173 C5.2@51.76,47.173 C6.2@52.522,47.935 52.767,47.935 52.999,48.166 53.047,48.166 U3.5@53.485,48.604 ; v2(53.34,45.593) 53.34,45.664 54.031,46.355 C7.2@54.031,46.426 ; C7.2@54.038,46.433 54.038,46.805 U3.8@54.775,47.542 ; v2(59.944,65.786) 60.002,65.728 60.408,65.728 60.66,65.476 C35.1@60.904,65.476 61.109,65.476 62.187,64.398 U1.108@62.22,64.398 ; v2(64.643,70.485) 64.725,70.485 65.044,70.167 65.708,70.167 C39.1@65.715,70.16 65.715,70.128 66.816,69.026 U1.95@66.816,68.994 ; v2(64.77,55.499) 64.778,55.499 65.468,56.19 C36.1@65.476,56.19 65.935,56.648 65.935,56.783 66.463,57.311 U1.121@66.463,57.344 ; v2(68.199,51.943) 68.199,52.025 68.778,52.605 C33.1@68.778,52.761 68.778,52.776 69.259,53.257 69.415,53.257 69.966,53.808 U1.131@69.998,53.808 ; v2(68.58,74.295) 69.072,74.295 C38.1@69.525,73.843 69.713,73.843 70.673,72.883 U1.84@70.705,72.883 ; v2(72.898,48.514) C32.1@73.589,47.823 74.179,48.413 74.179,48.796 U1.144@74.594,49.212 ; v2(73.025,89.535) 73.001,89.559 73.001,90.527 C12.2@72.977,90.551 73.979,90.551 U6.1@74.022,90.595 ; R1.2@74.464,32.131 74.464,32.681 v2(75.057,33.274) ; U1.72@77.406,76.772 77.821,77.188 77.821,77.22 77.561,77.481 77.561,77.926 C31.1@78.049,78.415 78.049,78.659 78.232,78.842 v2(78.232,79.629) ; C2.1@79.962,47.371 80.135,47.198 80.135,46.693 80.391,46.437 v2(80.391,46.355) ; C2.1@79.962,47.381 80.892,48.311 X1.4@80.892,48.498 ; v2(80.391,43.561) 81.639,43.561 R27.1@81.706,43.628 ; U1.62@80.941,73.237 80.974,73.237 81.502,73.765 81.623,73.765 C30.1@82.098,74.239 ; C30.1@82.105,74.246 82.622,74.246 82.65,74.274 83.377,74.274 83.484,74.168 v2(83.566,74.168) ; U1.17@83.063,54.869 83.066,54.869 84.142,53.792 C40.1@84.145,53.792 84.145,53.572 84.524,53.193 84.524,53.017 v2(84.582,52.959) ; U1.52@84.477,69.701 84.509,69.701 85.492,70.683 C37.1@85.654,70.683 86.084,71.114 86.084,71.479 v2(86.106,71.501) ; Y1.4@86.053,53.361 85.385,53.361 85.041,53.017 84.64,53.017 v2(84.582,52.959) ; v2(86.36,60.452) 86.418,60.394 86.73,60.394 U1.30@87.659,59.465 87.659,59.432 88.187,58.904 88.187,58.483 C29.1@88.575,58.095 ; Y1.1@87.397,52.017 87.397,51.818 C41.1@86.119,50.54 84.582,52.076 v2(84.582,52.959) ; U1.39@89.073,65.105 89.106,65.105 90.112,66.111 C34.1@90.226,66.111 90.233,66.118 90.75,66.118 90.778,66.146 91.378,66.146 91.612,65.913 v2(91.694,65.913) ; R2.2@91.194,80.907 v2(92.075,81.788) ; U5.2@92.366,37.4 93.243,36.523 94.317,36.523 94.541,36.747 94.771,36.747 C10.2@95.433,37.409 95.441,37.409 96.131,38.1 v2(96.139,38.1) ; FB1.1@92.718,60.333 92.773,60.333 93.543,59.563 v2(93.599,59.563) ; R3.2@93.607,78.367 93.607,78.43 94.361,79.184 v2(94.361,79.248) ; U2.1@95.703,89.241 95.879,89.418 96.124,89.418 96.217,89.511 96.242,89.511 97.219,90.488 97.585,90.488 C3.2@98.354,91.257 98.859,91.763 99.383,91.763 v2(99.441,91.821) ; U4.1@99.155,83.806 99.244,83.894 99.244,83.926 98.954,84.216 98.954,84.636 99.315,84.996 99.629,84.996 99.83,84.796 U4.15@99.862,84.796 100.2,85.133 100.2,85.165 100.128,85.237 100.128,85.308 C9.2@99.258,86.177 C8.2@98.496,86.939 98.56,86.939 99.377,87.757 v2(99.441,87.757) ; U10.14@101.782,66.421 103.169,66.421 103.423,66.675 v2(103.505,66.675) ; R4.2@103.894,83.193 103.957,83.193 104.712,83.947 v2(104.775,83.947)
5V: C16.2 C17.1 D1.1 L1.2 P2.6 R7.2 U7.3 U8.1 | length 64.9
  Top Layer w0.152: 46.228,91.313 46.355,91.313 R7.2@47.71,91.313
  Top Layer w0.75: C16.2@36.147,90.17 36.147,89.101 37.211,90.165 37.211,90.678 ; D1.1@36.192,66.294 v2(41.656,66.294) 41.656,89.916 ; 44.704,86.868 45.593,85.979 46.67,85.979 U8.1@46.684,85.993
  Bottom Layer w0.75: v2(41.656,66.294) 41.656,59.69 37.719,55.753 37.719,45.466 P2.6@42.291,40.894
Bat_Arm: C23.2 C24.2 C25.2 C26.2 C27.2 C28.2 P3.1 Q2.2 Q4.2 | length 43.1
  Top Layer w0.254: v2(111.379,66.675) 112.499,66.675 113.327,67.503 Q2.2@113.377,67.503 ; v2(111.506,77.851) 111.53,77.875 118.213,77.875 C24.2@118.237,77.899 C25.2@119.38,77.899 C23.2@120.523,77.899 121.968,77.899 P3.1@122.047,77.978 122.095,78.026 C28.2@122.095,80.264 C26.2@122.095,81.28 C27.2@122.095,82.296 ; v2(113.284,54.991) 113.284,56.996 Q4.2@113.377,57.089
  Bottom Layer w0.254: v2(111.506,77.851) 111.506,66.884 111.379,66.757 v2(111.379,66.675) 111.379,59.944 111.76,59.563 111.76,56.515 v2(113.284,54.991)
BATT: C15.1 C21.1 C22.1 J3.P P3.2 R9.1 R12.1 U7.5 U7.6 | length 36.9
  Top Layer w0.254: 104.902,75.438 105.029,75.311 R12.1@105.029,72.432 ; R9.1@105.029,69.13 105.029,69.205 105.918,70.094 105.918,75.438
  Top Layer w0.75: J3.P@29.845,81.07 34.325,81.07 C22.1@34.925,80.47 C21.1@36.068,80.47 ; v2(31.623,87.884) 32.083,87.884 C15.1@32.766,88.567 33.375,88.567 33.681,88.261 34.735,88.261 ; 104.902,75.438 105.918,75.438 P3.2@122.047,75.438
CON_USB_N: J4.A7 J4.B7 U9.1 | length 9.1
  Top Layer w0.202: J4.B7@32.225,64.25 30.344,64.25 30.226,64.132 30.226,63.5 30.476,63.25 33.42,63.25 33.485,63.316 33.851,63.316 33.916,63.25 35.187,63.25 35.683,63.746 U9.1@36.279,63.746
CON_USB_P: J4.A6 J4.B6 U9.3 | length 10.6
  Top Layer w0.202: v2(30.861,62.23) 31.381,62.75 32.225,62.75 35.679,62.75 35.683,62.746 U9.3@36.279,62.746 ; J4.A6@32.225,63.75 33.213,63.75 33.278,63.816 33.59,63.816 v2(33.655,63.881)
  Bottom Layer w0.202: v2(30.861,62.23) 32.004,62.23 v2(33.655,63.881)
"FIRE 1": R10.2 R11.2 U1.46 | length 12.1
  Top Layer w0.254: U1.46@86.598,67.58 88.243,69.225 96.826,69.225 R11.2@96.901,69.3 96.944,69.257 97.933,69.257 R10.2@97.975,69.215
"FIRE 1 LOW": U1.35 U10.1 | length 10.9
  Top Layer w0.254: U1.35@89.427,61.233 89.459,61.233 89.987,60.705 91.058,60.705 v2(91.059,60.706) ; v2(94.361,66.421) U10.1@96.332,66.421
  Bottom Layer w0.254: v2(91.059,60.706) 94.361,64.008 v2(94.361,66.421)
"FIRE 2": R15.2 R16.2 U1.47 | length 13.3
  Top Layer w0.254: U1.47@86.245,67.933 91.04,72.729 R16.2@96.393,72.729 96.436,72.686 97.494,72.686 R15.2@97.536,72.644
"FIRE 2 LOW": U1.41 U10.5 | length 13.5
  Top Layer w0.254: v2(87.122,62.611) 87.122,64.568 U1.41@88.366,65.812 ; v2(90.932,61.849) 92.964,61.849 93.472,61.341 U10.5@96.332,61.341
  Bottom Layer w0.254: v2(87.122,62.611) 90.17,62.611 v2(90.932,61.849)